# Altium PCB power-v3.2-exp.PcbDoc (part 1 of 2)
Units mil, origin at the board's own origin, x right, y up, seen from the top; angles counter-clockwise.
Board outline 6141.73 x 2047.24 mil, 4 copper layers (Top Layer, Layer 1, Layer 2, Bottom Layer), stack 60.469 mil thick; 175 components, 101 nets, 496 pads, 48 vias.
Unrouted connection lines stored in the file: 349.
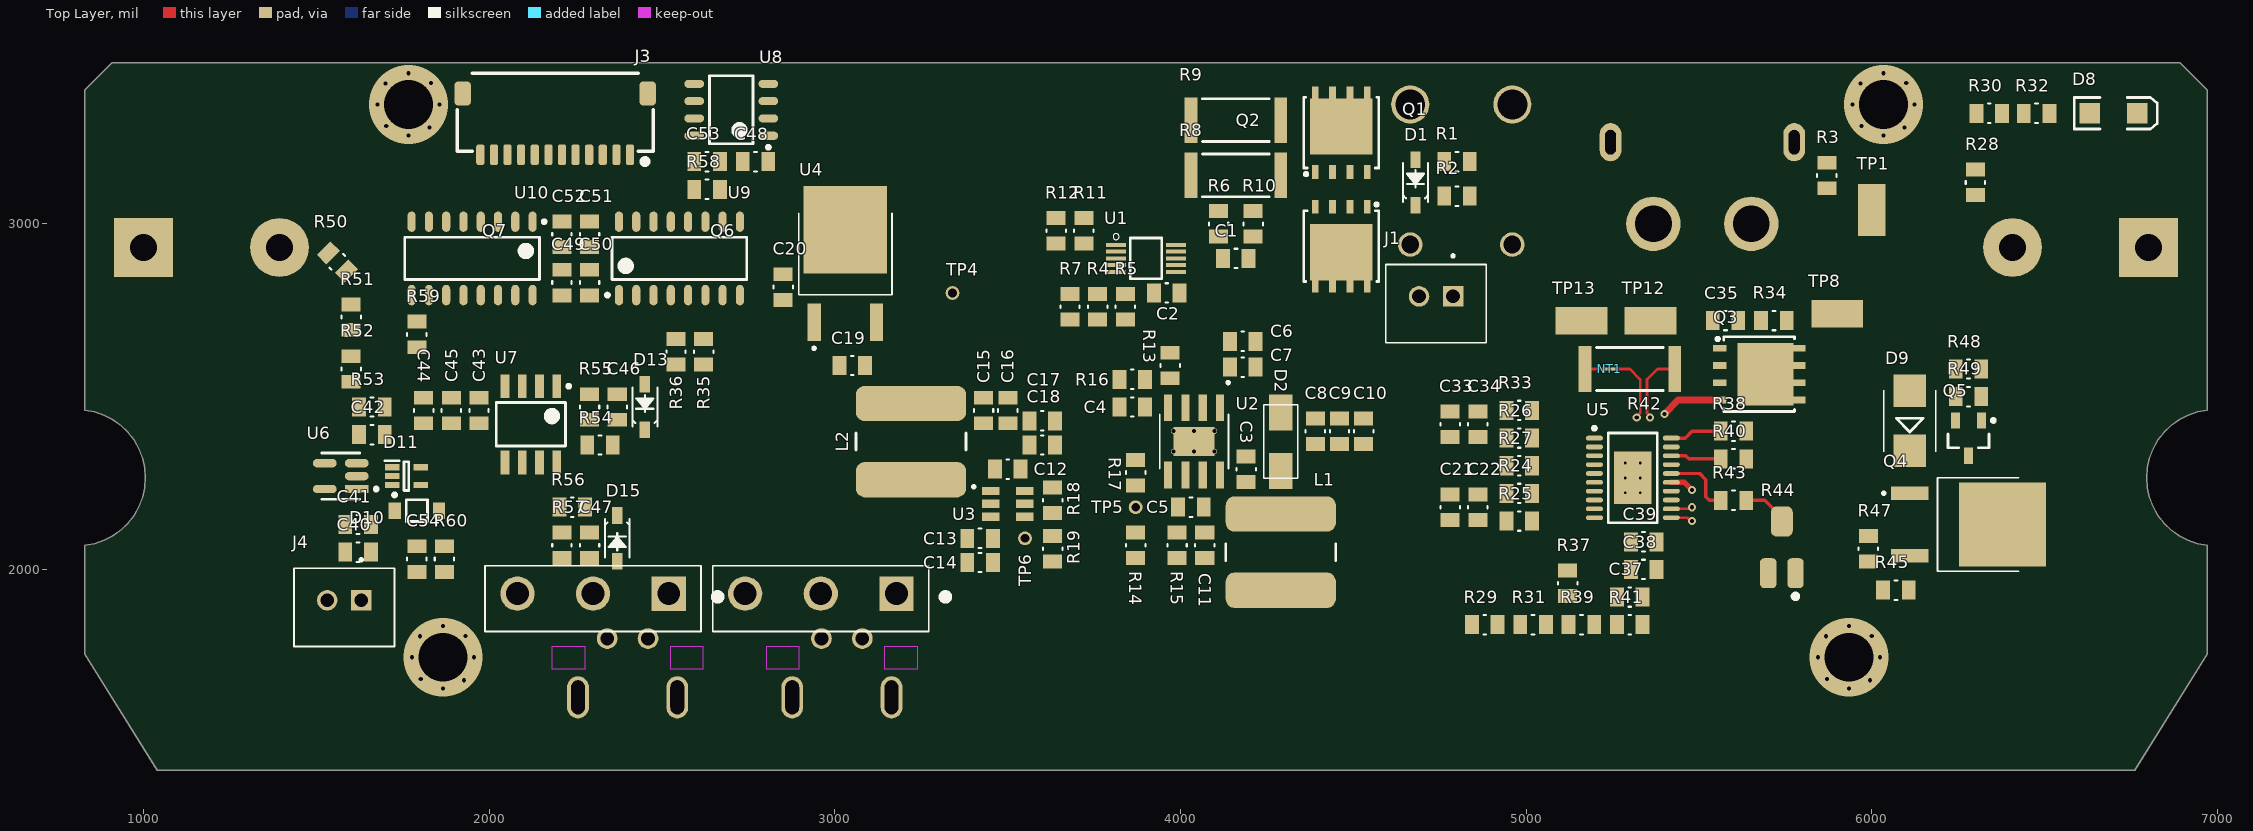
[diagram p0: Top Layer view]
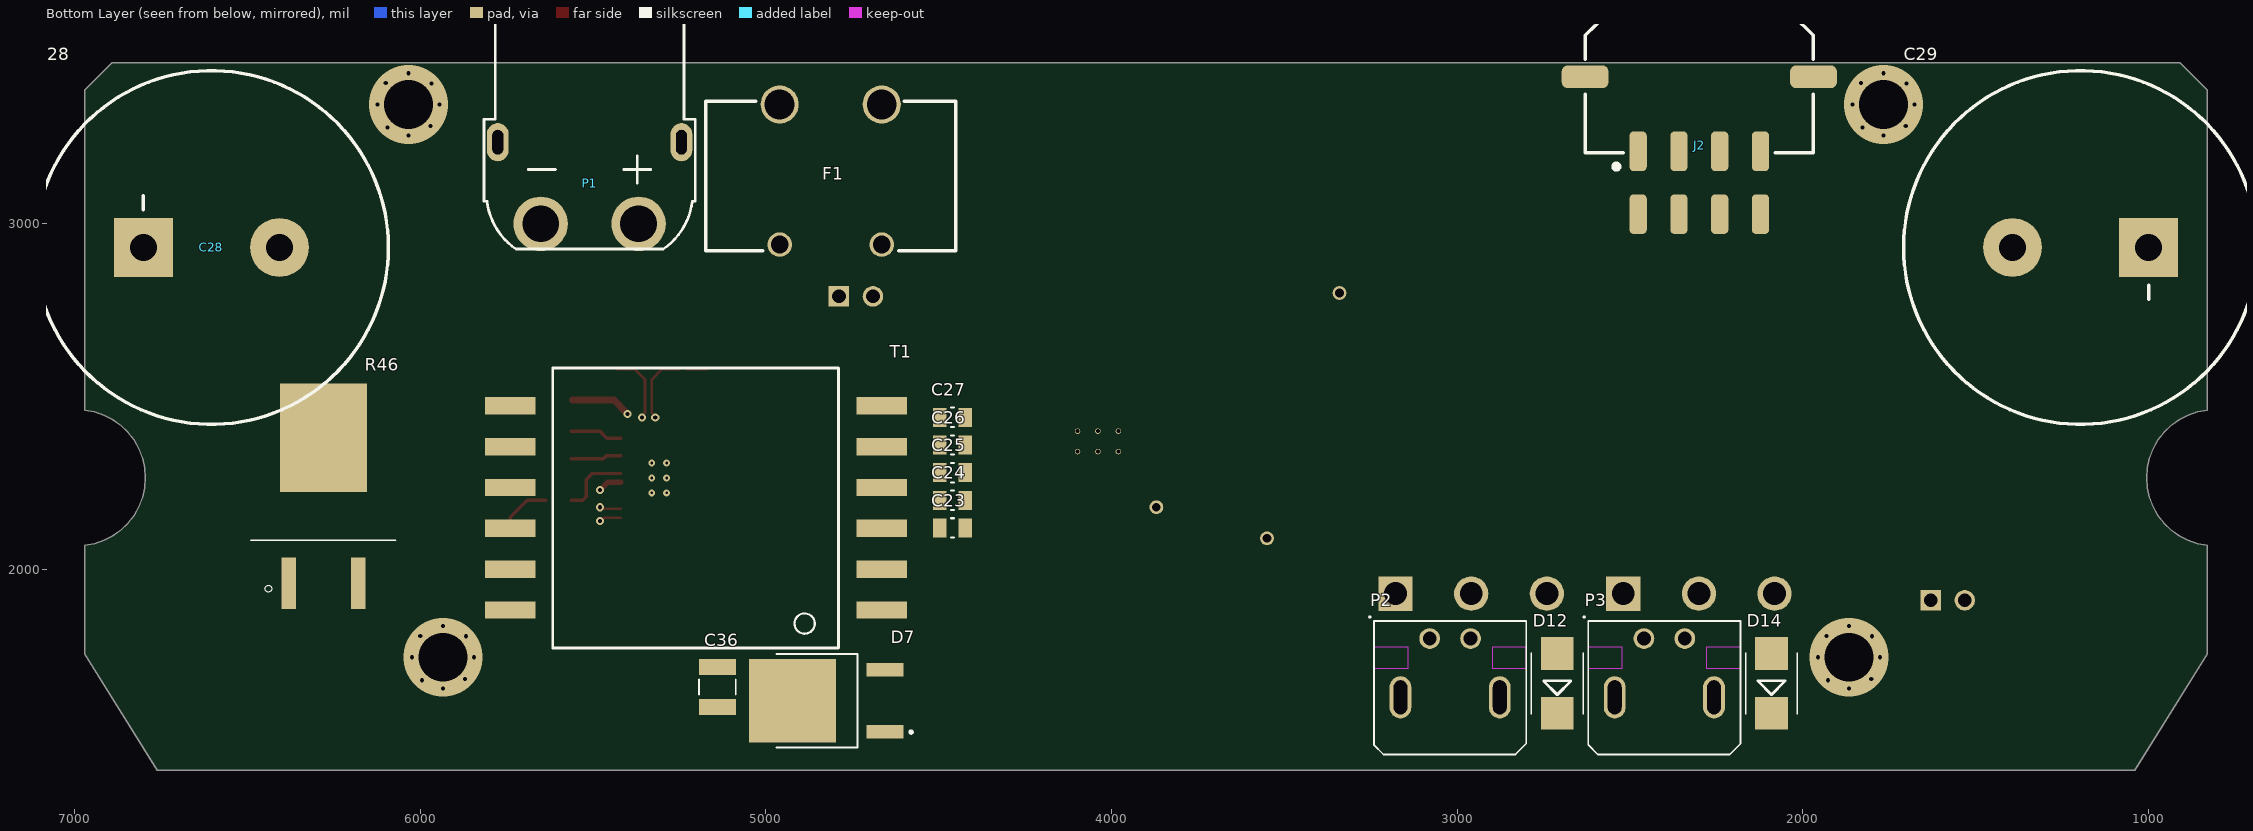
[diagram p1: Bottom Layer view, seen from below]
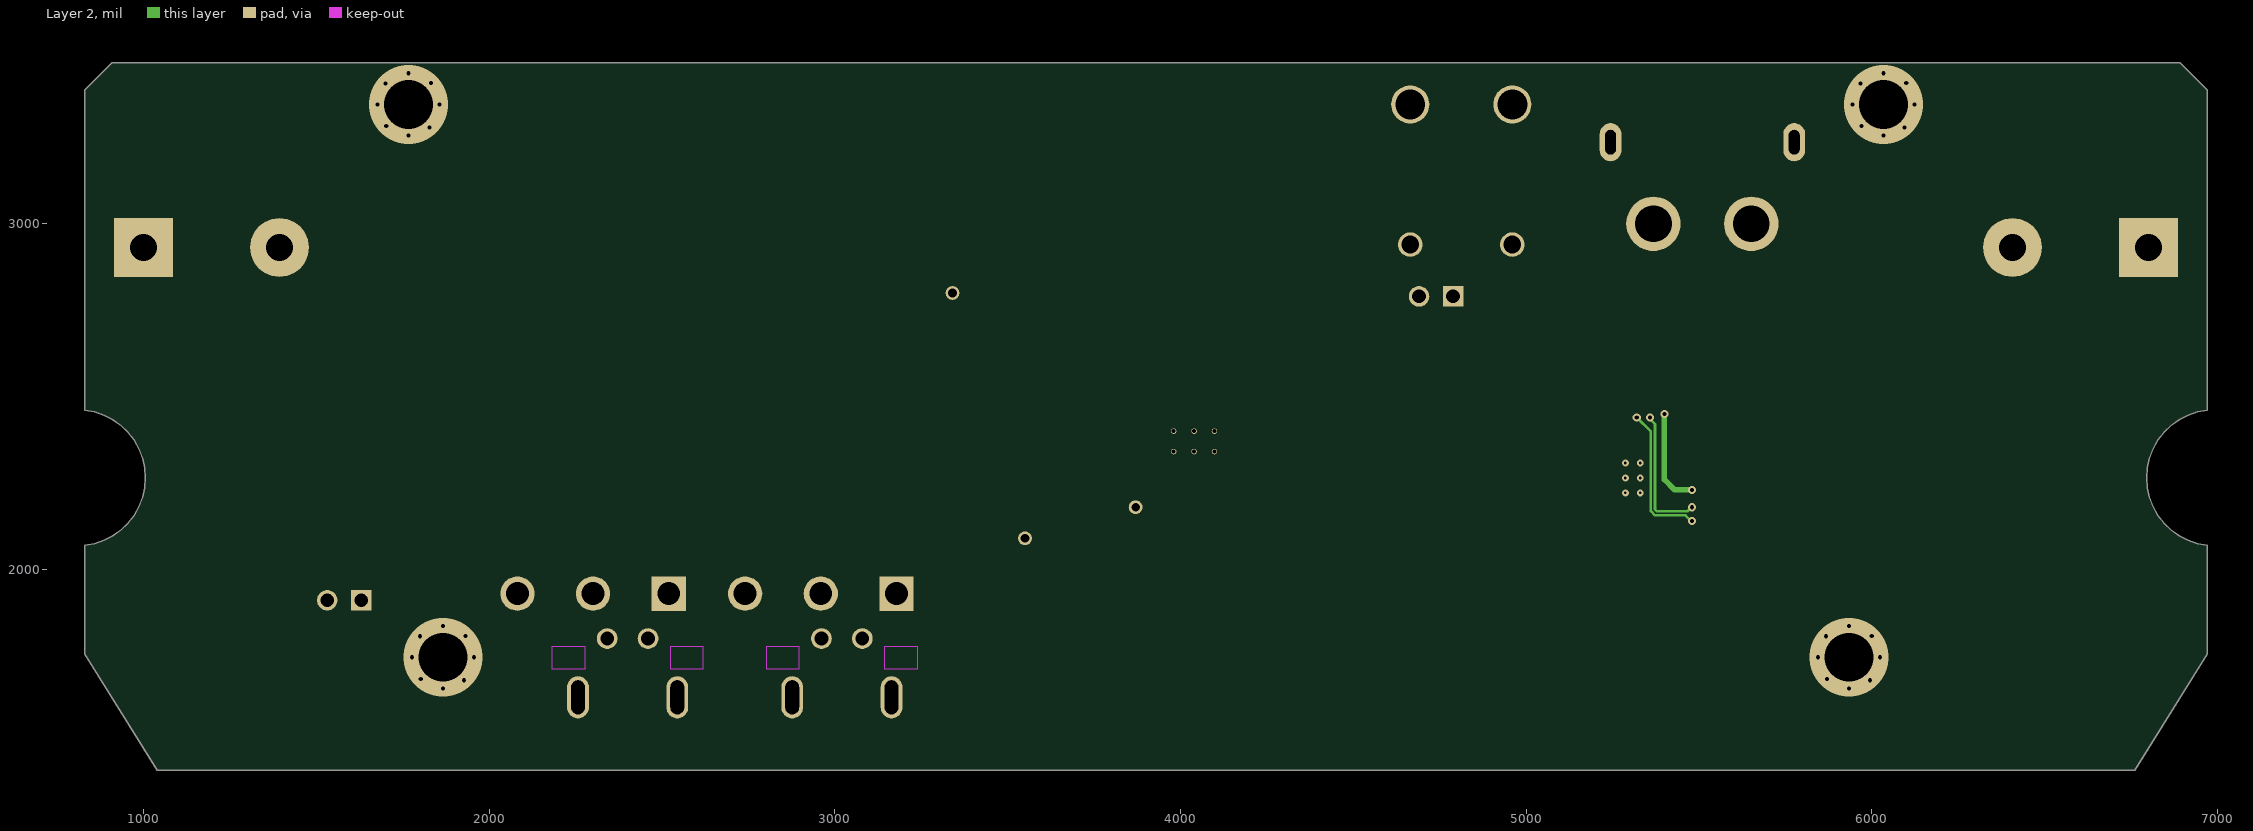
[diagram p2: Layer 2]

## Layer stack, top to bottom
Top Solder: solder mask 0.4, Solder Resist, Dk 3.5
Top Layer: signal copper 1.378
Dielectric 2: prepreg 7.874, PP-006, Dk 4.1
Layer 1: signal copper 0.018
Dielectric 1: dielectric 41.929, FR-4, Dk 4.8
Layer 2: signal copper 0.018
Dielectric 3: prepreg 7.874, PP-006, Dk 4.1
Bottom Layer: signal copper 1.378
Bottom Solder: solder mask 0.4, Solder Resist, Dk 3.5

## Board outline
6970.87,2460.98 6970.87,3387.4 6892.12,3466.14 907.87,3466.14 829.13,3387.4 829.13,2460.98 857.42,2455.79 884.65,2446.53 910.24,2433.4 933.64,2416.68 954.36,2396.73 971.95,2373.98 986.04,2348.9 996.32,2322.04 1002.58,2293.97 1004.68,2265.29 1002.58,2236.6 996.32,2208.53 986.04,2181.67 971.95,2156.6 954.36,2133.84 933.64,2113.89 910.24,2097.18 884.65,2084.05 857.42,2074.79 829.13,2069.59 829.13,1754.63 1039.37,1418.9 6760.63,1418.9 6970.87,1754.63 6970.87,2069.59 6942.58,2074.79 6915.35,2084.05 6889.76,2097.18 6866.36,2113.89 6845.64,2133.84 6828.05,2156.6 6813.96,2181.67 6803.68,2208.53 6797.42,2236.6 6795.32,2265.29 6797.42,2293.97 6803.68,2322.04 6813.96,2348.9 6828.05,2373.98 6845.64,2396.73 6866.36,2416.68 6889.76,2433.4 6915.35,2446.53 6942.58,2455.79

## Design rules (kind name [scope] priority, off if disabled: settings)
BoardOutlineClearance [All] p1: gap=7.87 ignorepadtopadclearanceinfootprint=FALSE except(15.75: Arc-SplitBarrior Arc-SplitContinuation Track-SplitBarrior Track-SplitContinuation SMDPad-SplitBarrior SMDPad-SplitContinuation THPad-SplitBarrior THPad-SplitContinuation Via-SplitBarrior Via-SplitContinuation Fill-SplitBarrior Fill-SplitContinuation Poly-SplitBarrior Poly-SplitContinuation Region-SplitBarrior Region-SplitContinuation Text-SplitBarrior Text-SplitContinuation)
Clearance "Clearance Bottom Layer" [OnLayer('Bottom Layer')] p1: gap=8 ignorepadtopadclearanceinfootprint=TRUE except(10: Arc-Text Track-Text SMDPad-Text THPad-Text Via-Text Fill-Text Poly-Text Region-Text Text-Text)
Clearance "Clearance Top Layer" [OnLayer('Top Layer')] p2: gap=8 ignorepadtopadclearanceinfootprint=TRUE except(10: Arc-Text Track-Text SMDPad-Text THPad-Text Via-Text Fill-Text Poly-Text Region-Text Text-Text)
Clearance [All] p3: gap=7.87 ignorepadtopadclearanceinfootprint=FALSE except(3.5: Arc-Arc Arc-Track Arc-SMDPad Track-Track Track-SMDPad SMDPad-SMDPad; 5: Arc-Via Track-Via SMDPad-Via THPad-Via Via-Via; 10: Arc-Text Track-Text SMDPad-Text THPad-Text Via-Text Fill-Text Poly-Text Region-Text Text-Text)
HoleSize [All] p1: absolutevalues=TRUE maxlimit=248.03 minlimit=7.87 maxpercent=80.000 minpercent=20.000
MinimumAnnularRing [All] p1: minimumring=3
MinimumSolderMaskSliver [All] p1: minsoldermaskwidth=3.94
PolygonConnect PolygonConnect_1 [All] p1: thpad.connectstyle=Relief thpad.reliefconductorwidth=20 thpad.reliefentries=4 thpad.polygonreliefangle="90 Angle" thpad.airgapwidth=10 smdpad.connectstyle=Relief smdpad.reliefconductorwidth=20 smdpad.reliefentries=4 smdpad.polygonreliefangle="90 Angle" smdpad.airgapwidth=10 via.connectstyle=Direct via.reliefconductorwidth=20 via.reliefentries=4 via.polygonreliefangle="90 Angle" via.airgapwidth=10
RoutingCorners [All] p1: cornerstyle=Round minsetback=100 maxsetback=100
RoutingVias [All] p1: holewidth=19.68 width=39.37 viastyle="Through Hole" minholewidth=7.87 minwidth=17.72 maxholewidth=39.37 maxwidth=78.74
SilkToSilkClearance [All] p1: silktosilkclearance=3.94
SilkToSolderMaskClearance [IsPad] p1: minsilkscreentomaskgap=3.94 clearancetoexposedcopper=TRUE
SolderMaskExpansion [All] p1: expansion=4 istentingtop=FALSE
Width [All] p1: maxlimit=100 minlimit=3.5 preferedwidth=15
25 further rules are at their usual default settings.

## Classes and differential pairs
component class "Power Regulation": C3 C4 C5 C6 C7 C8 C9 C10 C11 C12 C13 C14 C15 C16 C17 C18 C19 C20 D2 D3 D4 D5 D6 L1 L2 R13 R14 R15 R16 R17 R18 R19 R20 R21 R22 R23 TP5 TP6 U2 U3 U4
component class "Power Input": C1 C2 D1 F1 J1 P1 Q1 Q2 R1 R2 R3 R4 R5 R6 R7 R8 R9 R10 R11 R12 TP1 TP2 TP3 TP4 U1
component class "Kicker and Chipper": C43 C44 C45 C47 D12 D13 D14 D15 P2 P3 Q6 Q7 R54 R55 R56 R57 U7
component class HV-Measurement: C40 C41 D10 D11 R50 R51 R52 R53 TP16 TP17 U6
component class "Flyback Converter": C21 C22 C23 C24 C25 C26 C27 C28 C29 C30 C31 C32 C33 C34 C35 C36 C37 C38 C39 D7 D8 NT1 Q3 R24 R25 R26 R27 R28 R29 R30 R31 R32 R33 R34 R35 R36 R37 R38 R39 R40 R41 R42 R43 R44 T1 TP7 TP8 TP9 TP10 TP11 TP12 TP13 U5
component class "Connections and Communications": C47 C49 C51 C53 J2 J4 R58 R59 R60 U8 U9 U10
component class "Auto Discharge": D9 Q4 Q5 R45 R46 R47 R48 R49 TP14 TP15

## Components (designator, comment, footprint, x,y, rotation, side; value= is the part's Value field where it differs from the comment)
C1 "100nF 50V" 0805 4160,2900 r180 top value=100nF
C2 "100nF 50V" 0805 3960,2800 r0 top value=100nF
C3 "100nF 50V" 0805 4190,2290 r270 top value=100nF
C4 "8.2nF 50V" 0805 3860,2470 r0 top value=8.2nF
C5 "10pF" 0805 4030,2180 r180 top
C6 "10uF" 0805 4180,2660 r0 top
C7 "10uF" 0805 4180,2585.12 r0 top
C8 "10uF" 0805 4390,2400 r90 top
C9 "10uF" 0805 4460,2400 r90 top
C10 "10uF" 0805 4530,2400 r90 top
C11 "2700pF 50V" 0805 4070,2070 r270 top value=2700pF
C12 "100nF 50V" 0805 3500,2290 r180 top value=100nF
C13 "10uF" 0805 3420,2090 r180 top
C14 "10uF" 0805 3420,2020 r180 top
C15 "10uF" 0805 3430,2460 r270 top
C16 "10uF" 0805 3500,2460 r270 top
C17 "10uF" 0805 3600,2430 r180 top
C18 "10uF" 0805 3600,2360 r180 top
C19 "10uF" 0805 3050,2590 r180 top
C20 "10uF" 0805 2850,2817 r270 top
C21 "10uF" 0805 4780,2180 r270 top
C22 "0.10uF" 0805 4860,2180 r270 top
C23 "10uF" 0805 4460,2120 r0 bottom
C24 "10uF" 0805 4460,2200 r0 bottom
C25 "10uF" 0805 4460,2280 r0 bottom
C26 "10uF" 0805 4460,2360 r0 bottom
C27 "10uF" 0805 4460,2440 r0 bottom
C28 "1000uF 250V" "RADIAL, CAN - THRU 25.4mm" 6801,2931.67 r180 bottom locked
C29 "1000uF 250V" "RADIAL, CAN - THRU 25.4mm" 999,2931.67 r0 bottom locked
C30 "1000uF 250V" "RADIAL, CAN - THRU 25.4mm" 19745,3375 r0 top
C31 "1000uF 250V" "RADIAL, CAN - THRU 25.4mm" 20825,3375 r0 top
C32 "680uF" "RADIAL, CAN - THRU 10mm - RIGHTANGLE" 7598.43,3490 r0 top
C33 "10uF" 0805 4780,2420 r90 top
C34 "0.10uF" 0805 4860,2420 r90 top
C35 "2.2uF" 0805 5577,2720 r180 top
C36 "0.1uF" 1210 5140,1660 r90 bottom
C37 "0.10uF" 0805 5300,1920 r0 top
C38 "10uF" 0805 5340,2000 r180 top
C39 "0.10uF" 0805 5340,2080 r180 top
C40 "1.0uF" 0805 1620,2050 r180 top
C41 "0.010uF" 0805 1620,2130 r0 top
C42 "0.010uF" 0805 1660,2390 r180 top
C43 "0.1uF 25V" 0805 1970,2460 r270 top value=0.1uF
C44 "10uF" 0805 1810,2460 r90 top
C45 "10uF" 0805 1890,2460 r90 top
C46 "0.1uF 25V" 0805 2370,2470 r270 top value=0.1uF
C47 "0.1uF 25V" 0805 2290,2070 r90 top value=0.1uF
C48 "0.1uF 25V" 0805 2770,3180 r180 top value=0.1uF
C49 "0.1uF 25V" 0805 2210,2830 r90 top value=0.1uF
C50 "0.1uF 25V" 0805 2290,2830 r90 top value=0.1uF
C51 "0.1uF 25V" 0805 2290,2970 r270 top value=0.1uF
C52 "0.1uF 25V" 0805 2210,2970 r270 top value=0.1uF
C53 "0.1uF 25V" 0805 2630,3180 r0 top value=0.1uF
C54 "0.010uF" 0805 1790,2030 r90 top
D1 "3SMBJ5929B-TP" SOD-123 4680,3120 r90 top
D2 "40V 3A" DO-214AC 4290,2370 r270 top
D3 "LED2" 3.2X1.6X1.1 7355,6370 r90 top
D4 "LED2" 3.2X1.6X1.1 7210,6360 r90 top
D5 "LED2" 3.2X1.6X1.1 6810,6360 r90 top
D6 "LED2" 3.2X1.6X1.1 5960,6360 r90 top
D7 "VS-5EWH06FN-M3" "DPAK (TO-252)" 4820,1620 r90 bottom
D8 "LED2" 3.2X1.6X1.1 6700,3320 r0 top
D9 "3SMBJ5929B-TP" DO-214AA 6110,2430 r90 top
D10 "MMSZ4684T1G" ONSC-SOD-123-2-425-04_V 1790,2170 r0 top
D11 "DIODE TVS CPDV5-3V3UP" SOT65P230X110-5N 1760,2270 r0 top
D12 "SD560BTR" DO-214AA 2710,1670 r90 bottom
D13 "SM5817PL-TP" SOD-123 2450,2470 r90 top
D14 "SD560BTR" DO-214AA 2090,1670 r90 bottom
D15 "SM5817PL-TP" SOD-123 2370,2090 r270 top
F1 "3557-2" FUSE-3549-2 4812.36,3345.51 r0 bottom
J1 "B2B-XH-A(LF)(SN)" JST_B2B-XH-A(LF)(SN) 4739.21,2769.33 r180 top
J2 "CN HDR 8POS Molex 43045-0809 (R)" "CN 043045-0809" 2299,3425.5 r0 bottom
J3 "20239612" "CN 20239612" 2190.31,3377.17 r180 top
J4 "B2B-XH-A(LF)(SN)" JST_B2B-XH-A(LF)(SN) 1580,1890 r180 top
L1 "SRN8040TA-150M" INDP8279X40M 4290,2050 r270 top
L2 "SRN8040-3R3Y" INDP8279X40M 3220,2370 r90 top
NT1 "8mil Nettie" NT_8mil 5240,2580 r180 top
P1 "XT60" Amass_XT60PW-M 5510,3000 r180 bottom value=N/A
P2 "4365002" 43650-02 3020,1630 r180 bottom value=N/A
P3 "4365002" 43650-02 2400,1630 r180 bottom value=N/A
Q1 "AON6407" 8-PowerSMD 4465,3264.17 r90 top
Q2 "AON6407" 8-PowerSMD 4465,2935.83 r270 top
Q3 "BSC350N20NSFD" 8-PowerSMD 5674.17,2565 r0 top
Q4 "STD11N60DM2" "DPAK (TO-252)" 6275,2130 r270 top
Q5 "BSS127SSN-7" SOT95P245X89-3M 6280,2380 r270 top
Q6 "FGY75N60SMD" TO-247-3 3177.8,1930 r180 top
Q7 "FGY75N60SMD" TO-247-3 2518.9,1930 r180 top
R1 "100k" 0805 4800,3180 r0 top
R2 "100k" 0805 4800,3080 r0 top
R3 "5.1M" 0805 5870,3140 r90 top
R4 "10k" 0805 3760,2760 r90 top
R5 "10k" 0805 3840,2760 r90 top
R6 "10.0" 0805 4110,3000 r90 top
R7 "10k" 0805 3680,2760 r90 top
R8 "2mOHM" 2512 4160,3140 r0 top
R9 "2mOHM" 2512 4160,3300 r0 top
R10 "10.0" 0805 4210,3000 r90 top
R11 "10k" 0805 3720,2980 r90 top
R12 "10k" 0805 3640,2980 r90 top
R13 "169k" 0805 3970,2590 r270 top
R14 "10.2k" 0805 3870,2070 r270 top
R15 "10k" 0805 3990,2070 r270 top
R16 "18.7k" 0805 3860,2550 r180 top
R17 "732" 0805 3870,2280 r270 top
R18 "56.2k" 0805 3630,2200 r270 top
R19 "10k" 0805 3630,2060 r90 top
R20 "110" 0805 7550,6380 r90 top
R21 "270" 0805 7190,6140 r0 top
R22 "1k" 0805 6960,6430 r90 top
R23 "1.96K" 0805 6560,6430 r90 top value=1.96k
R24 "174k" 0805 4980,2220 r180 top
R25 "255k" 0805 4980,2140 r180 top
R26 "330k" 0805 4980,2380 r180 top
R27 "495k" 0805 4980,2300 r180 top
R28 "100k" 0805 6300,3120 r270 top
R29 "100k" 0805 4880,1840 r180 top
R30 "100k" 0805 6340,3320 r180 top
R31 "100k" 0805 5020,1840 r180 top
R32 "100k" 0805 6477,3320 r180 top
R33 "25.5k" 0805 4980,2460 r0 top
R34 "100k" 0805 5717,2720 r0 top
R35 "100k" 0805 2620,2630 r270 top
R36 "100k" 0805 2540,2630 r270 top
R37 "10k" 0805 5120,1960 r90 top
R38 "11.5k" 0805 5600,2400 r180 top
R39 "100k" 0805 5160,1840 r180 top
R40 "25.5k" 0805 5600,2320 r180 top
R41 "1.6k" 0805 5300,1840 r180 top
R42 "7mOHM" 2512 5300,2580 r0 top
R43 "910" 0805 5600,2200 r180 top
R44 "ADJ 200" "POT SMD" 5740,2060 r0 top
R45 "5.1M" 0805 6070,1940 r0 top
R46 "1k 50W" "D2PAK (TO-263)" 6280,2211.97 r180 bottom value=1.5k
R47 "5.1M" 0805 5990,2060 r270 top
R48 "270k" 0805 6280,2580 r180 top
R49 "100k" 0805 6280,2500 r0 top
R50 "330k" 0805 1560,2890 r135 top
R51 "330k" 0805 1600,2730 r90 top
R52 "330k" 0805 1600,2580 r90 top
R53 "13k" 0805 1660,2470 r0 top
R54 "110" 0805 2320,2360 r180 top
R55 "10k" 0805 2290,2470 r90 top
R56 "110" 0805 2240,2180 r180 top
R57 "10k" 0805 2210,2070 r270 top
R58 "JUMPER" 0805 2630,3100 r0 top value=0
R59 "JUMPER" 0805 1790,2680 r270 top value=0
R60 "100" 0805 1870,2030 r90 top
T1 "DA2034" DA2034 5220,2200 r0 bottom
TP1 "Test Point - 5019" TP380X203 6000,3040 r90 top
TP2 "Test Point (Via)" TP 1313,3810 r90 top
TP3 "Test Point (Via)" TP 898,3810 r90 top
TP4 "Test Point (Via)" TP 3340,2800 r90 top
TP5 "Test Point (Via)" TP 3870,2180 r90 top
TP6 "Test Point (Via)" TP 3550,2090 r180 top
TP7 "Test Point (Via)" TP 17250,3840 r90 top
TP8 "Test Point - 5019" TP380X203 5900,2740 r0 top
TP9 "Test Point (Via)" TP 10725,3870 r90 top
TP10 "Test Point (Via)" TP 9715,3870 r90 top
TP11 "Test Point (Via)" TP 9455,3870 r90 top
TP12 "Test Point - 5019" TP380X203 5360,2720 r180 top
TP13 "Test Point - 5019" TP380X203 5160,2720 r180 top
TP14 "Test Point (Via)" TP 8260,1720 r90 top
TP15 "Test Point (Via)" TP 7510,1720 r90 top
TP16 "Test Point (Via)" TP 2128,4125 r90 top
TP17 "Test Point (Via)" TP 1848,4125 r90 top
U1 "INA226AIDGSR" 10-VSSOP 3900,2900 r0 top
U2 "TPS54531DDA" 8-PowerSOIC 4039.06,2370.47 r270 top
U3 "TPS563200DDCR" TSOT-23-6 3500,2190 r0 top
U4 "ZLDO1117K33TC" "DPAK (TO-252)" 3030,2880 r0 top
U5 "LT3751EFE#PBF" LT-FE-20-EPV-CB_L 5308.78,2264.84 r0 top
U6 "MIC7300YM5-TR" FP-SOT23-5LD-PL-1-IPC_A 1570,2270 r180 top
U7 "IR4427STRPBF" 8-SOIC 2120,2420 r270 top
U8 "ISO Dual I2C" SOIC127P600X175-8N 2700,3330 r180 top
U9 "ISO QUAD UNI DIGITAL" SOIC127P600X175-16N 2550,2900 r90 top
U10 "ISO QUAD UNI DIGITAL" SOIC127P600X175-16N 1950,2900 r270 top

## Footprints (in the part's own frame and the unit in brackets; to place one, negate y for a bottom-side part, rotate by r counter-clockwise, add the part's x,y. Pads: shape width x height; smd on the part's side, far side on the other; paste and mask are expansions set on the pad)
3.2X1.6X1.1 [mm]
  rect 1.5x1.5 smd: 1(-1.75,0) 2(1.75,0)
  silkscreen extent -2.9,-1.15 3.2,1.15
8-PowerSMD [mm]
  rect 4.12x4.6 smd: D(0.46,0)
  rect 1x0.5 smd: D(2.9,-1.905) D(2.9,-0.635) D(2.9,0.635) D(2.9,1.905) G(-2.9,-1.905) S(-2.9,-0.635) S(-2.9,0.635) S(-2.9,1.905)
  silkscreen extent -3.13,-2.75 2.6,2.75, body extent -3.07,-2.57 3.08,2.58, height 1.1
8-PowerSOIC [mm]
  rect 1.97x0.6 smd: 1(-2.475,1.905) 2(-2.475,0.635) 3(-2.475,-0.635) 4(-2.475,-1.905) 5(2.475,-1.905) 6(2.475,-0.635) 7(2.475,0.635) 8(2.475,1.905)
  rect 2.13x3 smd: 9(0,0)
  round 0.4 hole 0.3: V1(-0.75,1.5) V2(0.75,1.5) V3(-0.75,0) V4(0.75,0) V5(-0.75,-1.5) V6(0.75,-1.5)
  silkscreen extent -4.42,-2.52 2,2.6, body extent -3.1,-2.49 3.1,2.49, height 1.68
8-SOIC [mm]
  rect 1.75x0.65 smd: 1(-2.8,1.905) 2(-2.8,0.635) 3(-2.8,-0.635) 4(-2.8,-1.905) 5(2.8,-1.905) 6(2.8,-0.635) 7(2.8,0.635) 8(2.8,1.905)
  silkscreen extent -2.92,-2.55 1.6,2.91, body extent -2,-2.55 2,2.55, height 1.7
10-VSSOP [mm]
  rect 1.45x0.3 smd: 1(-2.2,1) 2(-2.2,0.5) 3(-2.2,0) 4(-2.2,-0.5) 5(-2.2,-1) 6(2.2,-1) 7(2.2,-0.5) 8(2.2,0) 9(2.2,0.5) 10(2.2,1)
  silkscreen extent -2.42,-1.5 1.15,1.82
0805 [mil]
  rect 40x55 smd: 1(-37,0) 2(37,0)
  silkscreen extent -4,-28 4,28, body extent -47,-28 47,28, height 24
1210 [mm]
  rect 1.16x2.72 smd: 1(-1.475,0) 2(1.475,0)
  silkscreen extent -0.57,-1.35 0.57,1.35
2512 [mm] "Chip Resistor, 2-Leads, Body 6.35x3.10mm, IPC Low Density"
  rect 0.95x3.35 smd: 1(-3.3,0) 2(3.3,0)
  silkscreen extent -2.45,-1.58 2.45,1.58, body extent -3.22,-1.63 3.22,1.63, height 0.6
43650-02 [mm] "Molex Microfit 2PIN RightAngle Thru"
  round 1.52 hole 1.02: 1(-1.5,4.32) 2(1.5,4.32)
  oval 1.6x3.1 hole 1 slot 2.49 at 90 deg: NC(-3.65,0) NC(3.65,0)
  Keep-Out Layer region: -5.575,3.7 -3.125,3.7 -3.125,2.1 -5.575,2.1
  Keep-Out Layer region: 5.575,2.1 3.125,2.1 3.125,3.7 5.575,3.7
  silkscreen extent -5.96,-4.2 5.6,5.96, body extent -4.82,-4.55 4.83,5.35, height 2.7
Amass_XT60PW-M [mm] "Right angle XT60 Male Socket"
  round 4 hole 2.7: 1(-3.6,0) 2(3.6,0)
  rrect100% 1.6x2.8 hole 1.8 slot 0.8 at 0 deg: Un1(6.75,6) Un2(-6.75,6)
  silkscreen extent -7.76,-1.85 7.76,15.42, body extent -7.95,-1.95 7.95,16.3, height 8.4
"CN 043045-0809" [mil] "Molex Micro-Fit 0430450 SMD 8CKT"
  rrect50% 50x115 smd: 1(177,215.5) 2(59,215.5) 3(-59,215.5) 4(-177,215.5) 5(177,397.5) 6(59,397.5) 7(-59,397.5) 8(-177,397.5)
  rrect50% 135x65 smd: NC(-330.5,0) NC(330.5,0)
  silkscreen extent -330,-180 330,267, body extent -387,-180 387,426, height 346
"CN 20239612" [mm] "12 Circuit SMD Right Angle PicoClasp"
  rrect50% 0.6x1.5 smd: 1(-5.5,4.5) 2(-4.5,4.5) 3(-3.5,4.5) 4(-2.5,4.5) 5(-1.5,4.5) 6(-0.5,4.5) 7(0.5,4.5) 8(1.5,4.5) 9(2.5,4.5) 10(3.5,4.5) 11(4.5,4.5) 12(5.5,4.5)
  rrect50% 1.2x1.8 smd: NC(-6.8,0) NC(6.8,0)
  silkscreen extent -7.2,-1.5 7.21,5.15, body extent -7,-1.27 7,4.63, height 4.7
"D2PAK (TO-263)" [mm]
  rect 1.06x3.78 smd: 1(-2.54,-6.4) 2(2.54,-6.4)
  rect 6.39x8 smd paste-5 mask+0: 3(0,4.29)
  silkscreen extent -5.34,-7.05 5.32,-3.24, body extent -5.08,-7.62 5.08,7.62, height 4.83
DA2034 [mm]
  rect 3.7x1.27 smd: 1(-14.1,8.059) 2(-14.1,5.059) 3(-14.1,2.059) 4(-14.1,-0.941) 5(-14.1,-3.941) 6(-14.1,-6.941) 7(13.206,-6.941) 8(13.206,-3.941) 9(13.206,-0.941) 10(13.206,2.059) 11(13.206,5.059) 12(13.206,8.059)
  silkscreen extent -10.93,-9.73 10.07,10.85, body extent -14.82,-9.69 13.83,10.88, height 11.18
DO-214AA [mm]
  rect 2.4x2.4 smd: A(2.2,0) C(-2.2,0)
  silkscreen extent -2.26,-1.91 2.26,1.91
DO-214AC [mm]
  rect 2.65x1.75 smd: A(-2.15,0) C(2.15,0)
  silkscreen extent -2.7,-1.25 2.7,1.25
"DPAK (TO-252)" [mil]
  rect 38.58x107.87 smd: 1(-90,-165) 3(90,-165)
  rect 241.67x251.97 smd paste-157.48: 2(0,103)
  silkscreen extent -135,-244 135,150, body extent -128,-185 128,205, height 97
FP-SOT23-5LD-PL-1-IPC_A [mm]
  rect 1.756x0.61 smd paste+0 mask+0: 1(-1.175,0.95)
  rrect100% 1.756x0.61 smd paste+0 mask+0: 2(-1.175,0) 3(-1.175,-0.95) 4(1.175,-0.95) 5(1.175,0.95)
  silkscreen extent -2.73,-1.7 1.4,1.7, body extent -2.55,-1.95 2.55,1.95, height 0.25
FUSE-3549-2 [mm] "Keystone Miniblade FUSE_3549-2"
  round 2.8 hole 2.2: 1(-3.75,0) 4(3.75,0)
  round 1.8 hole 1.3: 2(-3.75,10.3) 3(3.75,10.3)
  silkscreen extent -9.2,-0.25 9.2,10.75, body extent -9.13,-0.02 8.9,10.45, height 5.84
INDP8279X40M [mm] "Precision Wire Wound Inductor, 2-Leads, Body 8.15x7.90mm, IPC Low Density"
  rrect50% 2.6x8.1 smd: 1(-2.8,0) 2(2.8,0)
  silkscreen extent -0.63,-4.05 0.63,4.05, body extent -4.01,-4 4.01,4, height 4
JST_B2B-XH-A(LF)(SN) [mm]
  rect 1.508x1.508 hole 1: 1(-1.25,-0.525)
  round 1.508 hole 1: 2(1.25,-0.525)
  silkscreen extent -3.7,-3.6 3.7,2.88, body extent -3.7,-2.85 3.7,2.9, height 7.1
LT-FE-20-EPV-CB_L [mm] "SOP, 20-Leads, Body 6.6x4.5mm, Pitch 0.65mm, Thermal Pad 3.86x2.74mm, IPC High Density"
  oval 1.25x0.35 smd: 1(-2.825,2.925) 2(-2.825,2.275) 3(-2.825,1.625) 4(-2.825,0.975) 5(-2.825,0.325) 6(-2.825,-0.325) 7(-2.825,-0.975) 8(-2.825,-1.625) 9(-2.825,-2.275) 10(-2.825,-2.925) 11(2.825,-2.925) 12(2.825,-2.275) 13(2.825,-1.625) 14(2.825,-0.975) 15(2.825,-0.325) 16(2.825,0.325) 17(2.825,0.975) 18(2.825,1.625) 19(2.825,2.275) 20(2.825,2.925)
  rect 2.74x3.86 smd: 21(0,0)
  silkscreen extent -2.95,-3.3 1.8,3.77, body extent -2.25,-3.3 2.25,3.3, height 1.2
NT_8mil [mil] "8mil wide nettie"
  rect 21x8 smd paste+0 mask+0: 1(-10,0) 2(10,0)
ONSC-SOD-123-2-425-04_V [mm] "SOD, 2-Leads, Body 2.69x1.6mm"
  rect 0.91x1.22 smd: 1(-1.635,0) 2(1.635,0)
  silkscreen extent -1.76,-0.8 0.78,1.28, body extent -1.35,-0.8 1.35,0.8, height 1.35
"POT SMD" [mm] "SMD Potentiometer NIDEC ST32EB"
  rrect50% 1.2x2.2 smd: 1(1,-1.8) 3(-1,-1.8)
  rrect50% 1.6x2.2 smd: 2(0,2)
  silkscreen extent 0.9,-3.6 1.1,-3.4, body extent -1.7,-2.2 1.7,2.2, height 2
"RADIAL, CAN - THRU 10mm - RIGHTANGLE" [mm]
  rect 1.108x1.108 hole 0.6: NEG(-2.5,0)
  round 0.6 hole 0.6: POS(2.5,0)
  Top Layer region: 3.097,0.24 2.81,0.553 2.387,0.571 2.074,0.285 2.056,-0.139 2.342,-0.451 2.766,-0.47 3.078,-0.183
  Bottom Layer region: 3.097,0.24 2.81,0.553 2.387,0.571 2.074,0.285 2.056,-0.139 2.342,-0.451 2.766,-0.47 3.078,-0.183
  Multi-Layer region: 3.097,0.24 2.81,0.553 2.387,0.571 2.074,0.285 2.056,-0.139 2.342,-0.451 2.766,-0.47 3.078,-0.183
  silkscreen extent -4.4,0 -3.6,0, body extent -5,-23.8 5,-1.8, height 11
"RADIAL, CAN - THRU 25.4mm" [mil]
  rect 170x170 hole 78.74: NEG(0,0)
  round 170 hole 78.74: POS(393.7,0)
  silkscreen extent -315,-512 709,512, body extent -303,-500 697,500, height 1772
SOD-123 [mil]
  rect 48x30 smd: A(66,0) C(-66,0)
  silkscreen extent -56,-36 56,36
SOIC127P600X175-8N [mm] "SOIC, 8-Leads, Body 4.91x3.95mm, Pitch 1.27mm, IPC Medium Density"
  oval 1.45x0.6 smd: 1(-2.725,1.905) 2(-2.725,0.635) 3(-2.725,-0.635) 4(-2.725,-1.905) 5(2.725,-1.905) 6(2.725,-0.635) 7(2.725,0.635) 8(2.725,1.905)
  silkscreen extent -2.85,-2.5 1.6,2.88, body extent -2,-2.5 2,2.5, height 1.75
SOIC127P600X175-16N [mm] "SOIC, 16-Leads, Body 9.90x3.90mm, Pitch 1.27mm, IPC Medium Density"
  oval 1.5x0.6 smd: 1(-2.7,4.445) 2(-2.7,3.175) 3(-2.7,1.905) 4(-2.7,0.635) 5(-2.7,-0.635) 6(-2.7,-1.905) 7(-2.7,-3.175) 8(-2.7,-4.445) 9(2.7,-4.445) 10(2.7,-3.175) 11(2.7,-1.905) 12(2.7,-0.635) 13(2.7,0.635) 14(2.7,1.905) 15(2.7,3.175) 16(2.7,4.445)
  silkscreen extent -2.82,-4.95 1.55,5.42, body extent -1.95,-4.95 1.95,4.95, height 1.75
SOT65P230X110-5N [mm]
  rect 1.05x0.45 smd: 1(-1.05,0.65) 2(-1.05,0) 3(-1.05,-0.65) 4(1.05,-0.65) 5(1.05,0.65)
  silkscreen extent -1.58,-1.05 0.18,1.12, body extent -1.15,-1.05 1.15,1.05, height 1.1
SOT95P245X89-3M [mm] "SOT23, 3-Leads, Body 2.90x2.45mm, Pitch 0.95mm, IPC Low Density"
  rect 1.2x0.65 smd: D(1.3,0) G(-1.3,0.95) S(-1.3,-0.95)
  silkscreen extent -1.42,-1.5 0.7,1.95, body extent -0.7,-1.5 0.7,1.5, height 0.89
TO-247-3 [mm]
  rect 2.52x2.52 hole 1.68: 1(0,0)
  round 2.52 hole 1.68: 2(5.56,0) 3(11.12,0)
  silkscreen extent -3.85,-2.04 13.5,2.78, body extent -2.44,-25.55 13.56,0.35, height 6.3
TP [mil] "Test point (40mil Standard)"
  round 40 hole 25: 1(0,0)
TP380X203 [mm]
  rect 3.8x2.03 smd: 1(0,0)
TSOT-23-6 [mm] "SOT-23-6 Thin"
  rect 1.3x0.6 smd: 1(-1.255,0.95) 2(-1.255,0) 3(-1.255,-0.95) 4(1.255,-0.95) 5(1.255,0) 6(1.255,0.95)
  silkscreen extent -2.6,1.15 -2.4,1.35, body extent -1.4,-1.45 1.4,1.45, height 0.97

## Part data
C1 C2 C3 C12: library part "CAP 100nF 50V", "CAP CER 0.1UF 50V X7R 0805", Package=0805, Rating=50V, Tolerance=10%
C4: library part "CAP 8.2nF 50V", "CAP CER 8200PF 50V X7R 0805", Operating Temperature="-55°C ~ 125°C", Package=0805, Rating=50V, Temperature Coefficient=X7R, Tolerance=10%
C5: library part "CAP 10pF 50V", "CAP CER 10PF 50V X7R 0603/0805", Operating Temperature="-55°C ~ 125°C", Package=0603/0805, Rating=50V, Temperature Coefficient=X7R, Tolerance=10%
C6 C7 C8 C9 C10 C13 C14 C15 C16 C17 C18 C19 C20 C21 C23 C24 C25 C26 C27 C33 C38 C44 C45: library part "CAP 10uF 35V", "CAP CER 10UF 35V X7R 0805", Operating Temperature="-55°C ~ 125°C", Package=0805, Rating=35V, Temperature Coefficient=X7R, Tolerance=10%
C11: library part "CAP 2700pF 50V", "CAP CER 2700PF 50V X7R 0805", Operating Temperature="-55°C ~ 125°C", Package=0805, Rating=50V, Temperature Coefficient=X7R, Tolerance=10%
C22 C34 C37 C39: library part "CAP 0.10uF 35V", "CAP CER 0.10UF 35V X7R 0603/0805", Operating Temperature="-55°C ~ 125°C", Package=0603/0805, Rating=35V, Temperature Coefficient=X7R, Tolerance=10%
C28 C29 C30 C31: library part "CAP POL 1000uF", "United Chemi-Con / ESMQ251VSN102MQ45S", Capacitance=1mF, Case/Package=Radial, Dielectric Material=Aluminium, Manufacturer="United Chemi-Con", Manufacturer Part Number=ESMQ251VSN102MQ45S, Max Operating Temperature=85°C, Min Operating Temperature=-40°C, Ripple Current=960mA, Supplier Part Number 1=565-2754-ND, Tolerance=20%, Voltage=250V, Diameter=25.4mm, Height - Seated (Max)=45mm, Lead Diameter=2mm, Lead Free="Lead Free", Lead Pitch=10mm, Life (Hours)=2000Hour, Mount="Through Hole,PCB", Number of Pins=2, REACH SVHC="No SVHC", RoHS=Yes, Supplier 1=Digi-Key, Termination=Radial
C32: library part "CAP POL 680uF TH", "NICHICON   UHW1V681MPD6 ALUMINUM ELECTROLYTIC CAPACITOR, 680UF, 35V, 20%, RADIAL, FULL REEL", Case/Package=Radial, Dielectric Material=Aluminium, Manufacturer=Nichicon, Manufacturer Part Number=UHW1V681MPD6, Supplier Part Number 1=493-6804-ND, Tolerance=20%, Voltage=35V, Capacitance=680uF, Number of Pins=2, RoHS=Yes, Supplier 1=Digi-Key, Termination=Radial
C35: library part "CAP 2.2uF 16V", "CAP CER 2.2UF 16V X5R 0603/0805", Operating Temperature="-55°C ~ 85°C", Package=0603/0805, Rating=16V, Temperature Coefficient=X5R, Tolerance=10%
C36: library part "CAP 0.1uF 630V", "CAP CER 0.1uF 630V X7R 1210", Operating Temperature="-55°C ~ 125°C", Package=1210, Rating=630V, Temperature Coefficient=X7R, Tolerance=10%
C40: library part "CAP 1.0uF 16V", "CAP CER 1.0UF 16V X5R 0603/0805", Operating Temperature="-55°C ~ 85°C", Package=0603/0805, Rating=16V, Temperature Coefficient=X5R, Tolerance=10%
C41 C42 C54: library part "CAP 0.010uF 16V", "CAP CER 0.010UF 16V X5R 0603/0805", Operating Temperature="-55°C ~ 85°C", Package=0603/0805, Rating=16V, Temperature Coefficient=X5R, Tolerance=10%
C43 C46 C47 C48 C49 C50 C51 C52 C53: library part "CAP 0.1uF 25V", "CAP CER 0.1UF 25V X7R 0805", Operating Temperature="-55°C ~ 125°C", Rating=25V, Temperature Coefficient=X7R, Tolerance=10%
D1 D9: library part "DIODE ZENER 15V 3W", "Diode ZENER 15V 3W", Supplier Part Number 1=3SMBJ5929BTPMSCT-ND, Supplier 1=Digi-Key
D2: library part "DIODE SCHOTTKY 40V 3A", "Diode Schottky 40V 3A Surface Mount SMA", Current - Average Rectified (Io)=3A, Package=DO-214AC, Voltage - DC Reverse (Vr) (Max)=40V, Voltage - Forward (Vf) (Max) @ If="450mV @ 3A", ComponentLink1Description=digikey, ComponentLink1URL=https://www.digikey.ca/product-detail/en/on-semiconductor/MBR0540T1G/MBR0540T1GOSCT-ND/917967
D3 D4 D5 D6 D8: library part "LED GREEN SMD", "Typical RED, GREEN, YELLOW, AMBER GaAs LED", Color=Green, Current - Test=20mA, Package=1206, Voltage - Forward (Vf) (Typ)=2V, Lens Transparency=Clear
D7: "Diode Switching 600V 5A DPAK", Digikey=VS-5EWH06FN-M3-ND, Digikey Link=https://www.digikey.ca/en/products/detail/vishay-semiconductor-diodes-division/VS-5EWH06FN-M3/4934509, MF="Vishay Diodes", MF PN=VS-5EWH06FN-M3
D10: library part "DIODE ZENER 3.3 500mW", "Zener 3V3 Voltage Regulator, 500 mW, 2-Pin SOD-123, Pb-Free, Tape and Reel", Manufacturer="On Semiconductor", Supplier Part Number 1=MMSZ4684T1GOSCT-ND, ComponentLink1Description="Manufacturer URL", ComponentLink1URL=http://www.onsemi.com/, ComponentLink2Description=Datasheet, ComponentLink2URL=http://www.onsemi.com/pub_link/Collateral/MMSZ4678T1-D.PDF, ComponentLink3Description="Package Specification", ComponentLink3URL=http://www.onsemi.com/pub_link/Collateral/425-04.PDF, DatasheetVersion="Rev. 9", Mounting Technology="Surface Mount", P Max (W)=0.5, PackageDescription="2-Pin SOD, Body 1.6 x 2.69 mm", PackageReference=SOD-123-2-425-04, PackageVersion="Rev. G, 10/2009", Packing="Tape and Reel", PartNumber=MMSZ4684T1G, RoHS=Pb-Free, Supplier 1=Digi-Key, VZ Typ (V)=3.3
D11: "TVS Diode Bidirectional Vbr = 3.5V, Working Voltage = 3.3V", Arrow Part Number=CPDV5-3V3UP, Manufacturer_Name="Comchip Technology", Mouser Part Number=750-CPDV5-3V3UP, Supplier Part Number 1=641-1422-1-ND, Arrow Price/Stock=https://www.arrow.com/en/products/cpdv5-3v3up/comchip-technology, Datasheet Link=http://www.comchiptech.com/admin/files/product/CPDV5-3V3UP-HF%20RevB181493.pdf, Height=1.1mm, Manufacturer_Part_Number=CPDV5-3V3UP, Mouser Price/Stock=https://www.mouser.com/Search/Refine.aspx?Keyword=750-CPDV5-3V3UP, Supplier 1=Digi-Key
D12 D14: library part "DIODE STANDARD 600V 5A", "Diode Standard 600V 5A Surface Mount SMB", Supplier Part Number 1=1655-1530-1-ND, Supplier 1=Digi-Key
D13 D15: library part "DIODE SCHOTTKY 20V 1A", "Diode Schottky 20V 1A Surface Mount SOD-123FL", Current Rating=1A, Package=SOD-123, Voltage Rating=20V, ComponentLink1Description=digikey, ComponentLink1URL=https://www.digikey.ca/product-detail/en/on-semiconductor/MBR0540T1G/MBR0540T1GOSCT-ND/917967, Digikey=SM5817PL-TPMSCT-ND, Digikey Link=https://www.digikey.ca/product-detail/en/micro-commercial-co/SM5817PL-TP/SM5817PL-TPMSCT-ND/1793410, MF="Micro Commercial Co", MP=SM5817PL-TP
F1: library part "FUSE BLADE", "Fuse Block 30A 500V 1 Circuit Blade Through Hole", Package="Nonstandard Keystone", Supplier Part Number 1=36-3557-2-ND, Availability=Unavailable, MF="Keystone Electronics", MP=3557-2, Price=None, SnapEDA_Link=https://www.snapeda.com/parts/3557-2/Keystone%20Electronics/view-part/278060/?ref=snap, Supplier 1=Digi-Key
J1 J4: "Connector Header Through Hole 2 position 0.098 _2.50mm_ / JST XH", Package=None, Availability=Unavailable, MF="JST Sales", MP=B2B-XH-A_LF__SN_, Price=None, SnapEDA_Link=https://www.snapeda.com/parts/B2B-XH-A%28LF%29%28SN%29/JST%20Sales%20America%20Inc./view-part/492310/?ref=snap
J2: "Molex 43045-0809 8POS Microfit / dual row, right angle, surface mount"
J3: library part "CN Pico Clasp 12POS", "12 POS Right Angle Pico Clasp Surface Mount"
L1: library part "IND 15UH 3.2A 50 MOHM", "15µH Semi-Shielded Wirewound Inductor 2.4A 70mOhm Max Nonstandard", Current - Saturation=4A, DC Resistance (DCR)=50mOhm, Inductance=15.0uH, Operating Temperature="-40°C ~ 125°C", Supplier Part Number 1=SRN8040TA-150MCT-ND, ComponentLink1Description=digikey, ComponentLink1URL=https://www.digikey.ca/en/products/detail/bourns-inc/SRU1048-8R2Y/2352912, Digikey=SRN8040TA-150MCT-ND, Digikey Link=https://www.digikey.ca/en/products/detail/bourns-inc/SRN8040TA-150M/6155130, Height - Seated (Max)=4.2mm, MF="Bourns Inc.", MP=SRN8040TA-150M, Size / Dimension="0.512\"\" L x 0.512\"\" W (13.00mm x 13.00mm)", Supplier 1=Digi-Key
L2: library part "IND 3.3UH 5.6A 21 MOHM SMD", "3.3µH Semi-Shielded Wirewound Inductor 5.6A 21mOhm Max Nonstandard", Inductance=3.3uH, Package=Nonstandard, ComponentLink1Description=digikey, ComponentLink1URL=https://www.digikey.ca/en/products/detail/bourns-inc/SRU1048-8R2Y/2352912, Digikey=SRN8040-3R3YCT-ND, Digikey Link=https://www.digikey.ca/en/products/detail/bourns-inc/SRN8040-3R3Y/2756131, MF="Bourns Inc.", MP=SRN8040-3R3Y, Price=None
NT1: library part NT_8, "8mil wide nettie"
P1: library part "XT60 Connector", "XT60 CONNECTORS FEMALE PAIR", Supplier Part Number 1=1568-1816-ND, Digikey=1568-1816-ND, Digikey Link=https://www.digikey.ca/product-detail/en/sparkfun-electronics/PRT-10474/1568-1816-ND/8258064, MF="SparkFun Electronics", MP=PRT-10474, Package=XT60, Price="2.13000 CAD", Supplier 1=Digi-Key
P2 P3: library part "CN MOLEX 4365002XX", "MOLEX MICROFIT 2CKT RIGHT THRU", Package=Microfit, Digikey=WM17581-ND, Digikey Link=https://www.digikey.com/en/products/detail/molex/0436500205/3310532?s=N4IgTCBcDaICwGYBsBWADGsaUgLoF8g, MF=MOLEX, MP=4365002XX, Price="1.44 CAD", Supplier 1=Digi-Key, Supplier Part Number 2=WM17581-ND
Q1 Q2: library part "MOSFET AON6407", "MOSFET P-CH 30V 32A 8DFN", Package=8-PowerSMD, Supplier Part Number 1=785-1421-1-ND, Digikey=785-1421-1-ND, Digikey Link=https://www.digikey.ca/product-detail/en/alpha-omega-semiconductor-inc/AON6407/785-1421-1-ND/3466800, MF="Alpha & Omega Semiconductor Inc.", MP=AON6407, Supplier 1=Digi-Key
Q3: library part "MOSFET BSC320N20NS3", "MOSFET N-CH 36A 200V", Package=8-PowerTDFN, Supplier Part Number 1=BSC320N20NS3GATMA1CT-ND, Digikey=BSC320N20NS3GATMA1CT-ND, Digikey Link=https://www.digikey.ca/en/products/detail/infineon-technologies/BSC320N20NS3GATMA1/2337851, MF=Infineon, Supplier 1=Digi-Key
Q5: "Small Signal N-Ch, 600Vds", MFG="Diodes Incorporated", Supplier=Digikey, Supplier PN=BSS127SSN-7DICT-ND
Q6 Q7: "IGBT Field Stop 600V 150A 750W Through Hole PowerTO-247-3", Package="TO-247 Fairchild Semiconductor", Power=750W, Supplier Part Number 1=FGY75N60SMDFS-ND, Ic max=150A, MF="ON Semiconductor", MP=FGY75N60SMD, Supplier 1=Digi-Key, Topology="Field Stop IGBT", Vce max=600V, Vge max=±20V
R1 R2 R29 R31 R34 R35 R36 R39 R49: library part "RES 100k 1/8W - 1%", "RES SMD 100K OHM 1% 1/8W 0805", Package=0805, Power (Watts)=0.125W, Tolerance=1%
R3 R45 R47: library part "RES 5.1M 1/8W-5%", "RES SMD 5.1 MOHM 5% 1/8W 0805", Package=0805, Power (Watts)=0.125W, Tolerance=5%
R4 R5 R7 R11 R12 R15 R19 R37 R55 R57: library part "RES 10k 1/8W - 1%", "RES SMD 10K OHM 1% 1/8W 0805", Package=0805, Power (Watts)=0.125W, Tolerance=1%
R6 R10: library part "RES 10.0 1/8W - 1%", "RES SMD 10.0 OHM 1% 1/8W 0805", Package=0805, Power (Watts)=0.125W, Tolerance=1%
R8 R9: library part "RES 2m 1W", "RES SMD 2m OHM 1% 1W 1206", Package=1206, Power (Watts)=1W, Tolerance=1%, Resistance=2mOHM
R13: library part "RES 169k 1/8W", "RES SMD 169K OHM 1% 1/8W 0805", Package=0805, Power (Watts)=0.125W, Tolerance=1%, ComponentLink1Description=digikey, ComponentLink1URL=https://www.digikey.ca/en/products/detail/yageo/RC0805FR-07169KL/727634
R14: library part "RES 10.2k 1/8W", "RES SMD 10.2K OHM 1% 1/8W 0805", Package=0805, Power (Watts)=0.125W, Tolerance=1%, ComponentLink1Description=digikey, ComponentLink1URL=https://www.digikey.ca/en/products/detail/panasonic-electronic-components/ERJ-6ENF1022V/111476
R16: library part "RES 18.7K 1/8W", "RES SMD 18.7K OHM 1% 1/8W 0805", Alternative Package=1206, Package=0805, Power (Watts)=0.125W, Tolerance=1%
R17: library part "RES 732.0 1/8W", "RES SMD 732 OHM 1% 1/8W 0805", Package=0805, Power (Watts)=0.125W, Tolerance=1%
R18: library part "RES 56.2k 1/10W", "RES SMD 56.2K OHM 1% 1/10W 0603", Package=0603, Power (Watts)=0.1W, Tolerance=1%
R20 R54 R56: library part "RES 110.0 1/8W - 1%", "RES SMD 110 OHM 1% 1/8W 0805", Package=0805, Power (Watts)=0.125W, Tolerance=1%
R21: library part "RES 270.0 1/8W", "RES SMD 270 OHM 5% 1/8W 0805", Package=0805, Power (Watts)=0.125W, Tolerance=5%
R22: library part "RES 1k 1/8W", "RES SMD 1K OHM 5% 1/8W 0805", Package=0805, Power (Watts)=0.125W, Tolerance=5%
R23: library part "RES 1.96k 1/8W", "RES SMD 1.96K OHM 1% 1/8W 0805", Package=0805, Power (Watts)=0.125W, Tolerance=1%
R24: library part "RES 174k 1/8W", "RES SMD 174K OHM 1% 1/8W 0805", Case Code (Imperial)=0805, Case Code (Metric)=2012, Manufacturer=Yageo, Manufacturer Part Number=RC0805FR-07174KL, Max Operating Temperature=155°C, Max Power Dissipation=125mW, Min Operating Temperature=-55°C, Package Quantity=1, Resistance=174kR, Supplier Part Number 1=311-174KCRCT-ND, Temperature Coefficient=100ppm/°C, Tolerance=1%, Voltage Rating=150V, Case/Package=0805, Category="Chip SMD Resistors", ComponentLink1Description=https://datasheet.ciiva.com/2509/pyu-r-int-thick-7-2509472.pdf?src-supplier=Digi-Key, ComponentLink1URL=https://datasheet.ciiva.com/2509/pyu-r-int-thick-7-2509472.pdf?src-supplier=Digi-Key, ComponentLink2Description=https://datasheet.ciiva.com/2509/pyu-r-int-thick-7-2509471.pdf?src-supplier=Digi-Key, ComponentLink2URL=https://datasheet.ciiva.com/2509/pyu-r-int-thick-7-2509471.pdf?src-supplier=Digi-Key, ComponentLink3Description=https://datasheet.ciiva.com/2509/pyu-r-int-thick-7-2509473.pdf?src-supplier=Digi-Key, ComponentLink3URL=https://datasheet.ciiva.com/2509/pyu-r-int-thick-7-2509473.pdf?src-supplier=Digi-Key, Composition="Thick Film", Contact Plating=Tin,Matte, Depth=1.25mm, Features="Moisture Resistant", Height=0.024inch, Lead Free="Lead Free", Length=2mm, Military Standard=Not, Number of Terminations=2, Packaging="Tape and Reel", Power Rating=125mW, Pricing 1="1=0.10000, 10=0.04000, 100=0.01630, 1000=0.00731, 2500=0.00635 (USD)", Radiation Hardening=No, RoHS=Yes, Stock 1=27863, Supplier 1=Digi-Key, Termination=SMD/SMT, Voltage Rating (DC)=150V, Width=0.049inch
R25: library part "RES 255k 0805", "0805 Resistor, 6A, 0.125W, 25ppm, 0.1%, 255K", Case Code (Imperial)=0805, Case Code (Metric)=2012, Manufacturer=Panasonic, Manufacturer Part Number=ERA-6AEB2553V, Max Operating Temperature=155°C, Max Power Dissipation=125mW, Min Operating Temperature=-55°C, Package Quantity=1, Resistance=255kR, Supplier Part Number 1=P255KDACT-ND, Temperature Coefficient=25ppm/°C, Tolerance=0.1%, Voltage Rating=200V, Voltage Rating (DC)=100V, Case/Package=0805, Category="Chip SMD Resistors", ComponentLink1Description=https://datasheet.ciiva.com/11810/0900766b80eb1d8c-11810615.pdf?src-supplier=RSComponents, ComponentLink1URL=https://datasheet.ciiva.com/11810/0900766b80eb1d8c-11810615.pdf?src-supplier=RSComponents, ComponentLink2Description=https://datasheet.ciiva.com/41450/001181380-da-01-en-widerstand-era-0805-255k-0-1-5000st-41450539.pdf?src-supplier=Conrad, ComponentLink2URL=https://datasheet.ciiva.com/41450/001181380-da-01-en-widerstand-era-0805-255k-0-1-5000st-41450539.pdf?src-supplier=Conrad, ComponentLink3Description=https://datasheet.ciiva.com/5981/485442-5981317.pdf?src-supplier=Farnell, ComponentLink3URL=https://datasheet.ciiva.com/5981/485442-5981317.pdf?src-supplier=Farnell, ComponentLink4Description=https://datasheet.ciiva.com/5981/485442-5981318.pdf?src-supplier=Farnell, ComponentLink4URL=https://datasheet.ciiva.com/5981/485442-5981318.pdf?src-supplier=Farnell, ComponentLink5Description=https://datasheet.ciiva.com/5981/485442-5981319.pdf?src-supplier=Farnell, ComponentLink5URL=https://datasheet.ciiva.com/5981/485442-5981319.pdf?src-supplier=Farnell, ComponentLink6Description=https://datasheet.ciiva.com/5981/485442-5981320.pdf?src-supplier=Farnell, ComponentLink6URL=https://datasheet.ciiva.com/5981/485442-5981320.pdf?src-supplier=Farnell, ComponentLink7Description=https://datasheet.ciiva.com/17206/aoa0000ce26-17206655.pdf?src-supplier=Avnet+Europe, ComponentLink7URL=https://datasheet.ciiva.com/17206/aoa0000ce26-17206655.pdf?src-supplier=Avnet+Europe, Composition="Metal Film,Thin Film", Contact Plating=Tin, Depth=1.25mm, Features="Automotive AEC-Q200", Height=0.5mm, Lead Free="Lead Free", Length=2mm, Military Standard=Not, Mount="Surface Mount", Number of Pins=2, Number of Terminations=2, Packaging="Tape and Reel", Power Rating=125mW, Pricing 1="1=0.36000, 10=0.30200, 100=0.11820, 1000=0.04948, 2500=0.04536 (USD)", Radiation Hardening=No, REACH SVHC="No SVHC", RoHS=Yes, Stock 1=7869, Supplier 1=Digi-Key, Termination=SMD/SMT, Weight=0.000194oz, Width=1.25mm
R26: library part "RES 330k 1/8W - 1%", "RES SMD 274K OHM 1% 1/8W 0805"
R27: library part "RES 495k 1/8W", "RES SMD 499K OHM 1% 1/8W 0805", Case Code (Imperial)=0805, Case Code (Metric)=2012, Manufacturer=Yageo, Manufacturer Part Number=RC0805FR-07499KL, Max Operating Temperature=155°C, Min Operating Temperature=-55°C, Power Rating=125mW, Resistance=499kR, Supplier Part Number 1=311-499KCRCT-ND, Temperature Coefficient=100ppm/°C, Tolerance=1%, Voltage Rating=150V, Case/Package=0805, Category="Chip SMD Resistors", ComponentLink1Description=https://datasheet.ciiva.com/15189/getdatasheetpartid-326570-15189975.pdf?src-supplier=Verical, ComponentLink1URL=https://datasheet.ciiva.com/15189/getdatasheetpartid-326570-15189975.pdf?src-supplier=Verical, Composition="Thick Film", Contact Plating=Tin,Lead,Matte, Depth=1.25mm, Lead Free="Lead Free", Length=2mm, Military Standard=Not, Packaging="Tape and Reel", Pricing 1="1=0.10000, 10=0.04000, 100=0.01630, 1000=0.00731, 2500=0.00635 (USD)", Radiation Hardening=No, RoHS=Yes, Stock 1=2275, Supplier 1=Digi-Key, Termination=SMD/SMT, Voltage Rating (DC)=150V
R28 R30 R32: library part "RES 100k 1/8W - 5%", "RES SMD 100K OHM 5% 1/8W 0805", Package=0805, Power (Watts)=0.125W, Tolerance=5%
R33 R40: library part "RES 25.5k 1/8W", "RES SMD 25.5K OHM 0.1% 1/8W 0805", Case Code (Imperial)=0805, Case Code (Metric)=2012, Manufacturer=Panasonic, Manufacturer Part Number=ERA-6AEB2552V, Max Operating Temperature=155°C, Max Power Dissipation=125mW, Min Operating Temperature=-55°C, Package Quantity=1, Resistance=25.5kR, Supplier Part Number 1=P25.5KDACT-ND, Temperature Coefficient=25ppm/°C, Tolerance=0.1%, Voltage Rating=100V, Case/Package=0805, Category="Chip SMD Resistors", ComponentLink1Description=https://datasheet.ciiva.com/11810/0900766b80eb1d8c-11810651.pdf?src-supplier=RSComponents, ComponentLink1URL=https://datasheet.ciiva.com/11810/0900766b80eb1d8c-11810651.pdf?src-supplier=RSComponents, ComponentLink2Description=https://datasheet.ciiva.com/26335/459526-da-01-en-widerstand-0805-era-26335831.pdf?src-supplier=Conrad, ComponentLink2URL=https://datasheet.ciiva.com/26335/459526-da-01-en-widerstand-0805-era-26335831.pdf?src-supplier=Conrad, ComponentLink3Description=https://datasheet.ciiva.com/7870/485442-7870651.pdf?src-supplier=Element14, ComponentLink3URL=https://datasheet.ciiva.com/7870/485442-7870651.pdf?src-supplier=Element14, ComponentLink4Description=https://datasheet.ciiva.com/5987/485442-5987308.pdf?src-supplier=Farnell, ComponentLink4URL=https://datasheet.ciiva.com/5987/485442-5987308.pdf?src-supplier=Farnell, ComponentLink5Description=https://datasheet.ciiva.com/7870/485442-7870652.pdf?src-supplier=Element14, ComponentLink5URL=https://datasheet.ciiva.com/7870/485442-7870652.pdf?src-supplier=Element14, ComponentLink6Description=https://datasheet.ciiva.com/30151/54aoa0000ce26-30151583.pdf?src-supplier=Onlinecomponents.com, ComponentLink6URL=https://datasheet.ciiva.com/30151/54aoa0000ce26-30151583.pdf?src-supplier=Onlinecomponents.com, ComponentLink7Description=https://datasheet.ciiva.com/9191/aoa0000ce26-9191422.pdf?src-supplier=Avnet, ComponentLink7URL=https://datasheet.ciiva.com/9191/aoa0000ce26-9191422.pdf?src-supplier=Avnet, Composition="Metal Film,Thin Film", Contact Plating=Tin, Depth=1.25mm, Features="Automotive AEC-Q200", Height=0.5mm, Lead Free="Lead Free", Length=2mm, Military Standard=Not, Mount="Surface Mount", Number of Pins=2, Number of Terminations=2, Packaging="Tape and Reel", Power Rating=125mW, Pricing 1="1=0.36000, 10=0.30200, 100=0.11820, 1000=0.04948, 2500=0.04536 (USD)", Radiation Hardening=No, RoHS=Yes, Stock 1=5872, Supplier 1=Digi-Key, Termination=Solder, Voltage Rating (DC)=100V, Width=1.25mm
R38: library part "RES 11.5k 1/8W", "RES SMD 11.5K OHM 0.1% 1/8W 0805 Thin Film", Case Code (Imperial)=0805, Case Code (Metric)=2012, Manufacturer=Panasonic, Manufacturer Part Number=ERA-6AEB1152V, Max Operating Temperature=155°C, Max Power Dissipation=125mW, Min Operating Temperature=-55°C, Package Quantity=1, Resistance=11.5kR, Supplier Part Number 1=P11.5KDACT-ND, Temperature Coefficient=25ppm/°C, Tolerance=0.1%, Voltage Rating=100V, Case/Package=0805, Category="Chip SMD Resistors", ComponentLink1Description=https://datasheet.ciiva.com/11810/0900766b80eb1d8c-11810868.pdf?src-supplier=RSComponents, ComponentLink1URL=https://datasheet.ciiva.com/11810/0900766b80eb1d8c-11810868.pdf?src-supplier=RSComponents, ComponentLink2Description=https://datasheet.ciiva.com/41450/001181306-da-01-en-widerstand-era-0805-11k5-0-1-5000st-41450464.pdf?src-supplier=Conrad, ComponentLink2URL=https://datasheet.ciiva.com/41450/001181306-da-01-en-widerstand-era-0805-11k5-0-1-5000st-41450464.pdf?src-supplier=Conrad, ComponentLink3Description=https://datasheet.ciiva.com/5987/485442-5987301.pdf?src-supplier=Farnell, ComponentLink3URL=https://datasheet.ciiva.com/5987/485442-5987301.pdf?src-supplier=Farnell, ComponentLink4Description=https://datasheet.ciiva.com/7829/485442-7829142.pdf?src-supplier=Element14, ComponentLink4URL=https://datasheet.ciiva.com/7829/485442-7829142.pdf?src-supplier=Element14, ComponentLink5Description=https://datasheet.ciiva.com/17211/aoa0000ce26-17211855.pdf?src-supplier=Avnet+Europe, ComponentLink5URL=https://datasheet.ciiva.com/17211/aoa0000ce26-17211855.pdf?src-supplier=Avnet+Europe, ComponentLink6Description=https://datasheet.ciiva.com/7829/485442-7829143.pdf?src-supplier=Element14, ComponentLink6URL=https://datasheet.ciiva.com/7829/485442-7829143.pdf?src-supplier=Element14, ComponentLink7Description=https://datasheet.ciiva.com/9193/aoa0000ce26-9193735.pdf?src-supplier=Avnet, ComponentLink7URL=https://datasheet.ciiva.com/9193/aoa0000ce26-9193735.pdf?src-supplier=Avnet, ComponentLink8Description=https://datasheet.ciiva.com/24024/aoa0000ce26-197354-24024328.pdf?src-supplier=Mouser, ComponentLink8URL=https://datasheet.ciiva.com/24024/aoa0000ce26-197354-24024328.pdf?src-supplier=Mouser, Composition="Thin Film,Metal Film", Contact Plating=Tin, Depth=1.25mm, Features="Automotive AEC-Q200", Height=0.5mm, Lead Free="Lead Free", Length=2mm, Military Standard=Not, Mount="Surface Mount", Number of Pins=2, Number of Terminations=2, Packaging="Tape and Reel", Power Rating=125mW, Pricing 1="1=0.34000, 10=0.28800, 100=0.11260, 1000=0.04712, 2500=0.04320 (USD)", Radiation Hardening=No, RoHS=Yes, Stock 1=10661, Supplier 1=Digi-Key, Termination=Solder, Voltage Rating (DC)=100V, Width=1.25mm
R41: library part "RES 1.6k 1/8W", "RES SMD 1.6K OHM 5% 1/8W 0805", Package=0805, Power (Watts)=0.125W, Tolerance=5%
R42: library part "RES 7m 3W", "RES SMD 7m OHM 1% 3W 2512", Package=1206, Power (Watts)=3W, Supplier Part Number 1=541-10361-1-ND, Tolerance=1%, ComponentLink1Description="Digikey Link", ComponentLink1URL=https://www.digikey.com/en/products/detail/vishay-dale/WFMB2512R0500FEA/9972278, Digikey=541-10282-1-ND, MFG=VISHAY, Resistance=7mOHM, Supplier 1=Digi-Key
R43: library part "RES 910.0 1/8W", "RES SMD 910 OHM 5% 1/8W 0805", Package=0805, Power (Watts)=0.125W, Tolerance=5%
R44: library part "RES POT 200", "SMD Potentiometer 200Ohm Range"
R46: library part "RES 1.5k 50W", "RES SMD 1.5K OHM 1% 50W D2PAK", Package="D2PAK (TO-263)", Power (Watts)=50W, Tolerance=1%
R48: library part "RES 270k 1/8W", "RES SMD 270K OHM 5% 1/8W 0805", Package=0805, Power (Watts)=0.125W, Tolerance=5%
R50 R51 R52: library part "RES 330k 1/8W - 5%", "RES SMD 330K OHM 5% 1/8W 0805", Package=0805, Power (Watts)=0.125W, Tolerance=5%
R53: library part "RES 13k 1/8W", "RES SMD 13K OHM 5% 1/8W 0805", Package=0805, Power (Watts)=0.125W, Tolerance=5%
R58 R59: library part "RES 0 JUMPER", "RES SMD 0 OHM JUMPER GENERIC 0805", Package=0805
R60: library part "RES 100.0 1/8W", "RES SMD 100 OHM 5% 1/8W 0805", Package=0805, Power (Watts)=0.125W, Tolerance=5%
T1: "Audio Transformers / Signal Transformers DA2032 Cap Chrgr For Linear LT3750/51", Supplier Part Number 1=994-DA2034-ALB, Supplier 1=Mouser
TP1 TP8 TP12 TP13: "PC Test Point, Miniature Phosphor Bronze, Silver Plating Surface Mount Mounting Type", Package="2010 Keystone", Digi-Key_Part_Number=36-5019CT-ND, Digi-Key_Purchase_URL=https://www.digikey.com/product-detail/en/keystone-electronics/5019/36-5019CT-ND/3907344?utm_source=snapeda&utm_medium=aggregator&utm_campaign=symbol, MF="Keystone Electronics", MP=5019
U1: library part "IC INA226AIDGSR", "36-V, Bi-Directional, Ultra-High Accuracy, Low-/High-Side, I2C Out Current/Power Monitor w/ Alert 10-VSSOP -40 to 125", Package="MSOP-10 Texas Instruments", Supplier Part Number 1=296-29034-6-ND, Digikey=296-29034-1-ND, Digikey Link=https://www.digikey.ca/product-detail/en/texas-instruments/INA226AIDGSR/296-29034-1-ND/2687118, MF="Texas Instruments", MP=INA226AIDGSR, Price=None, SnapEDA_Link=https://www.snapeda.com/parts/INA226AIDGSR/Texas%20Instruments/view-part/53552/?ref=snap, Supplier 1=Digi-Key
U2: "Buck Switching Regulator IC Positive Adjustable 0.8V 1 Output 5A 8-PowerSOIC _0.154, 3.90mm Width_", Package="SO-8 Texas Instruments", Supplier Part Number 1=296-36206-5-ND, MF="Texas Instruments", MP=TPS54531DDA, Price=None, SnapEDA_Link=https://www.snapeda.com/parts/TPS54531DDA/Texas%20Instruments/view-part/289535/?ref=snap, Supplier 1=Digi-Key
U3: "Buck Switching Regulator IC Positive Adjustable 0.76V 1 Output 3A SOT-23-6 Thin, TSOT-23-6", Package="TSOT-23 Texas Instruments", Supplier Part Number 1=296-43663-1-ND, Availability=Unavailable, MF="Texas Instruments", MP=TPS563200DDCR, Price=None, SnapEDA_Link=https://www.snapeda.com/parts/TPS563200DDCR/Texas%20Instruments/view-part/71685/?ref=snap, Supplier 1=Digi-Key
U4: "Linear Voltage Regulator IC Positive Fixed 1 Output  1A TO-252-3", Package=TO-252-3, Supplier Part Number 1=ZLDO1117K33DICT-ND, Digikey=ZLDO1117K33DIDKR-ND, Digikey Link=https://www.digikey.ca/product-detail/en/diodes-incorporated/ZLDO1117K33TC/ZLDO1117K33DIDKR-ND/2095639, MF="Diodes Incorporated", MP=ZLDO1117K33TC, Supplier 1=Digi-Key
U5: "Controller to 20-Pin TSSOP EP", Case/Package=TSSOP, Manufacturer="Analog Devices / Linear Technology", Max Input Voltage=24V, Max Operating Temperature=125°C, Min Operating Temperature=-40°C, Min Supply Voltage=4.75V, Operating Supply Current=5.5mA, Output Current=150mA, Output Voltage=500V, Package Quantity=74, Category="Voltage Regulators - Switching", ComponentLink1Description=https://datasheet.ciiva.com/15104/getdatasheetpartid-472813-15104438.pdf?src-supplier=Verical, ComponentLink1URL=https://datasheet.ciiva.com/15104/getdatasheetpartid-472813-15104438.pdf?src-supplier=Verical, ComponentLink2Description=https://datasheet.ciiva.com/31429/1692507-31429494.pdf?src-supplier=Farnell, ComponentLink2URL=https://datasheet.ciiva.com/31429/1692507-31429494.pdf?src-supplier=Farnell, ComponentLink3Description=https://datasheet.ciiva.com/1964/27024-1964843.pdf?src-supplier=Digi-Key, ComponentLink3URL=https://datasheet.ciiva.com/1964/27024-1964843.pdf?src-supplier=Digi-Key, Manufacturer Part Number=LT3751EFE#PBF, Max Supply Voltage=24V, Number of Outputs=1, Number of Pins=20, Packaging=Rail/Tube, Pricing 1="1=9.26000, 25=6.14640, 100=5.08200, 250=4.82792, 500=4.71900 (USD)", Radiation Hardening=No, REACH SVHC="No SVHC", RoHS=Yes, Stock 1=1231, Supplier 1=Digi-Key, Termination=SMD/SMT
U6: library part "OP AMP MIC7300YM5-TR", "IC OPAMP GP 1 CIRCUIT SOT23-5", Input Bias Current=0.0000005uA, Input Offset Voltage=1mV, Manufacturer=Microchip, Max Junction Temp=+85°C, Max Supply Voltage=10V, Min Supply Voltage=2.2V, Nominal Supply Current=0.7-1.5mA, Package=SOT23-5LD-PL-1, Supplier Part Number 1=576-1319-1-ND, Temperature="-40°C to +85°C", Temperature Range Low=-40°C, Voltage Gain=300-340V/mV, Automotive=No, Category=IC, ComponentLink2Description=Datasheet, ComponentLink2URL=http://www.microchip.com/mymicrochip/filehandler.aspx?ddocname=en580613, Device Class L1="Integrated Circuits (ICs)", Device Class L2="Linear ICs", Device Class L3="Amplifiers - Op Amps", Digikey Description="IC OPAMP GP 1 CIRCUIT SOT23-5", Footprint Url=https://ww1.microchip.com/downloads/en/PackagingSpec/00000049CH.pdf, Gain Bandwidth=0.55MHz, Height=1.45mm, Lead Free=Yes, Manufacturer Part Number=MIC7300YM5-TR, Mouser Description="Operational Amplifiers - Op Amps", Number Of Channels=1, Octopart=https://octopart.com/mic7300ym5-tr-microchip-66803593, RoHS=TRUE, Standoff Height=0mm, Supplier 1=Digi-Key, Temperature Range High=+85°C
U7: "Low-Side Gate Driver IC Non-Inverting 8-SOIC", Package="SOIC-8 Infineon", Supplier Part Number 1=IR4427SPBFCT-ND, Availability=Unavailable, MF="Infineon Technologies", MP=IR4427STRPBF, Price=None, SnapEDA_Link=https://www.snapeda.com/parts/IR4427STRPBF/Infineon%20Technologies/view-part/1815787/?ref=snap, Supplier 1=Digi-Key
U8: "Digital Isolation Dual Ch Bidirectional I2C", Revision=1
U9 U10: "Digital Isolation Quad Channel.", Revision=1
Q4: MFG=STMicroelectronics, Supplier=Digikey, Supplier PN=497-16925-1-ND